# EAGLE board Bienenlöter (EAGLE 4.09)
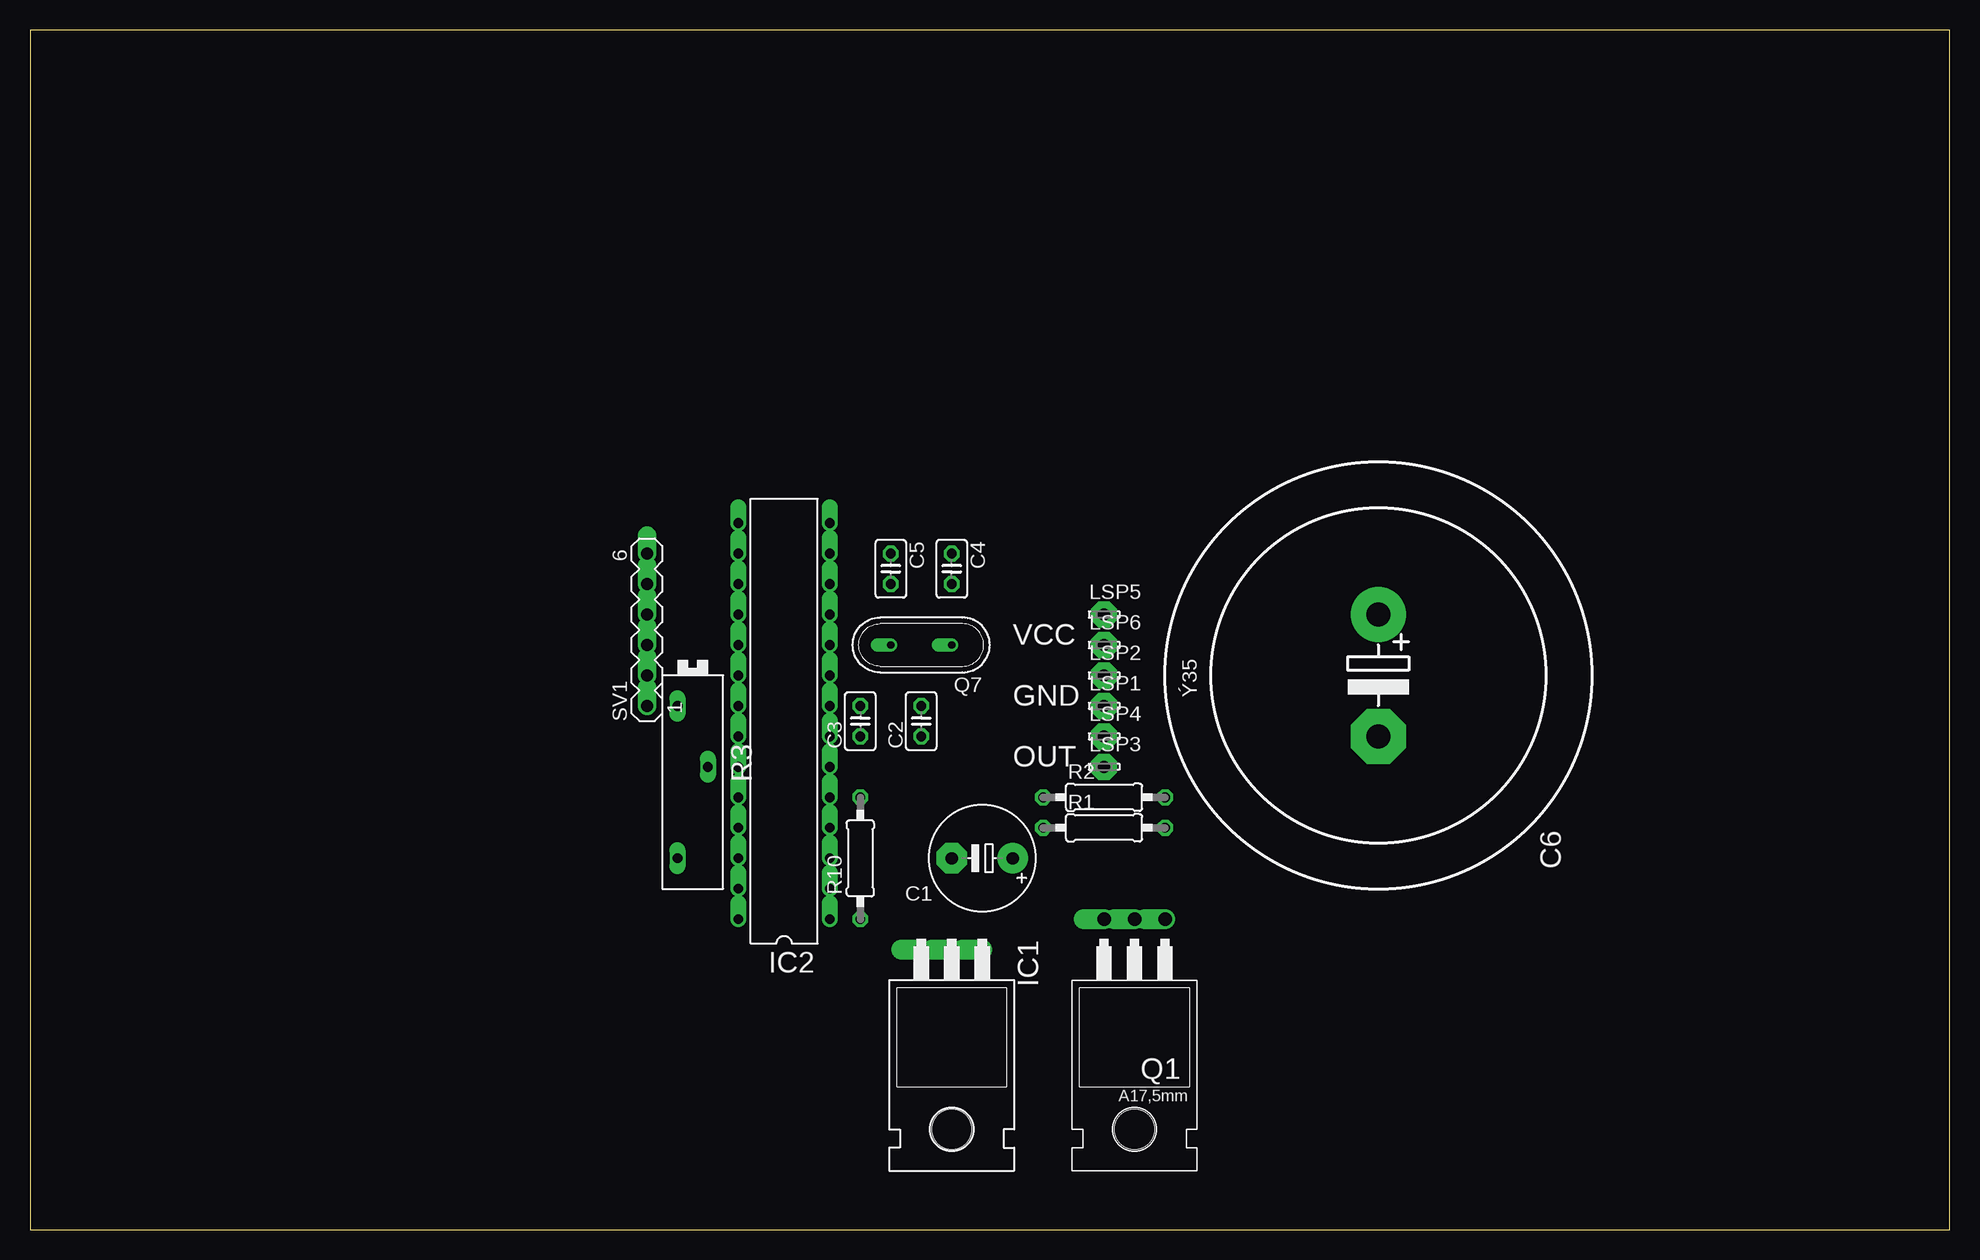
[diagram p0: board, top side]
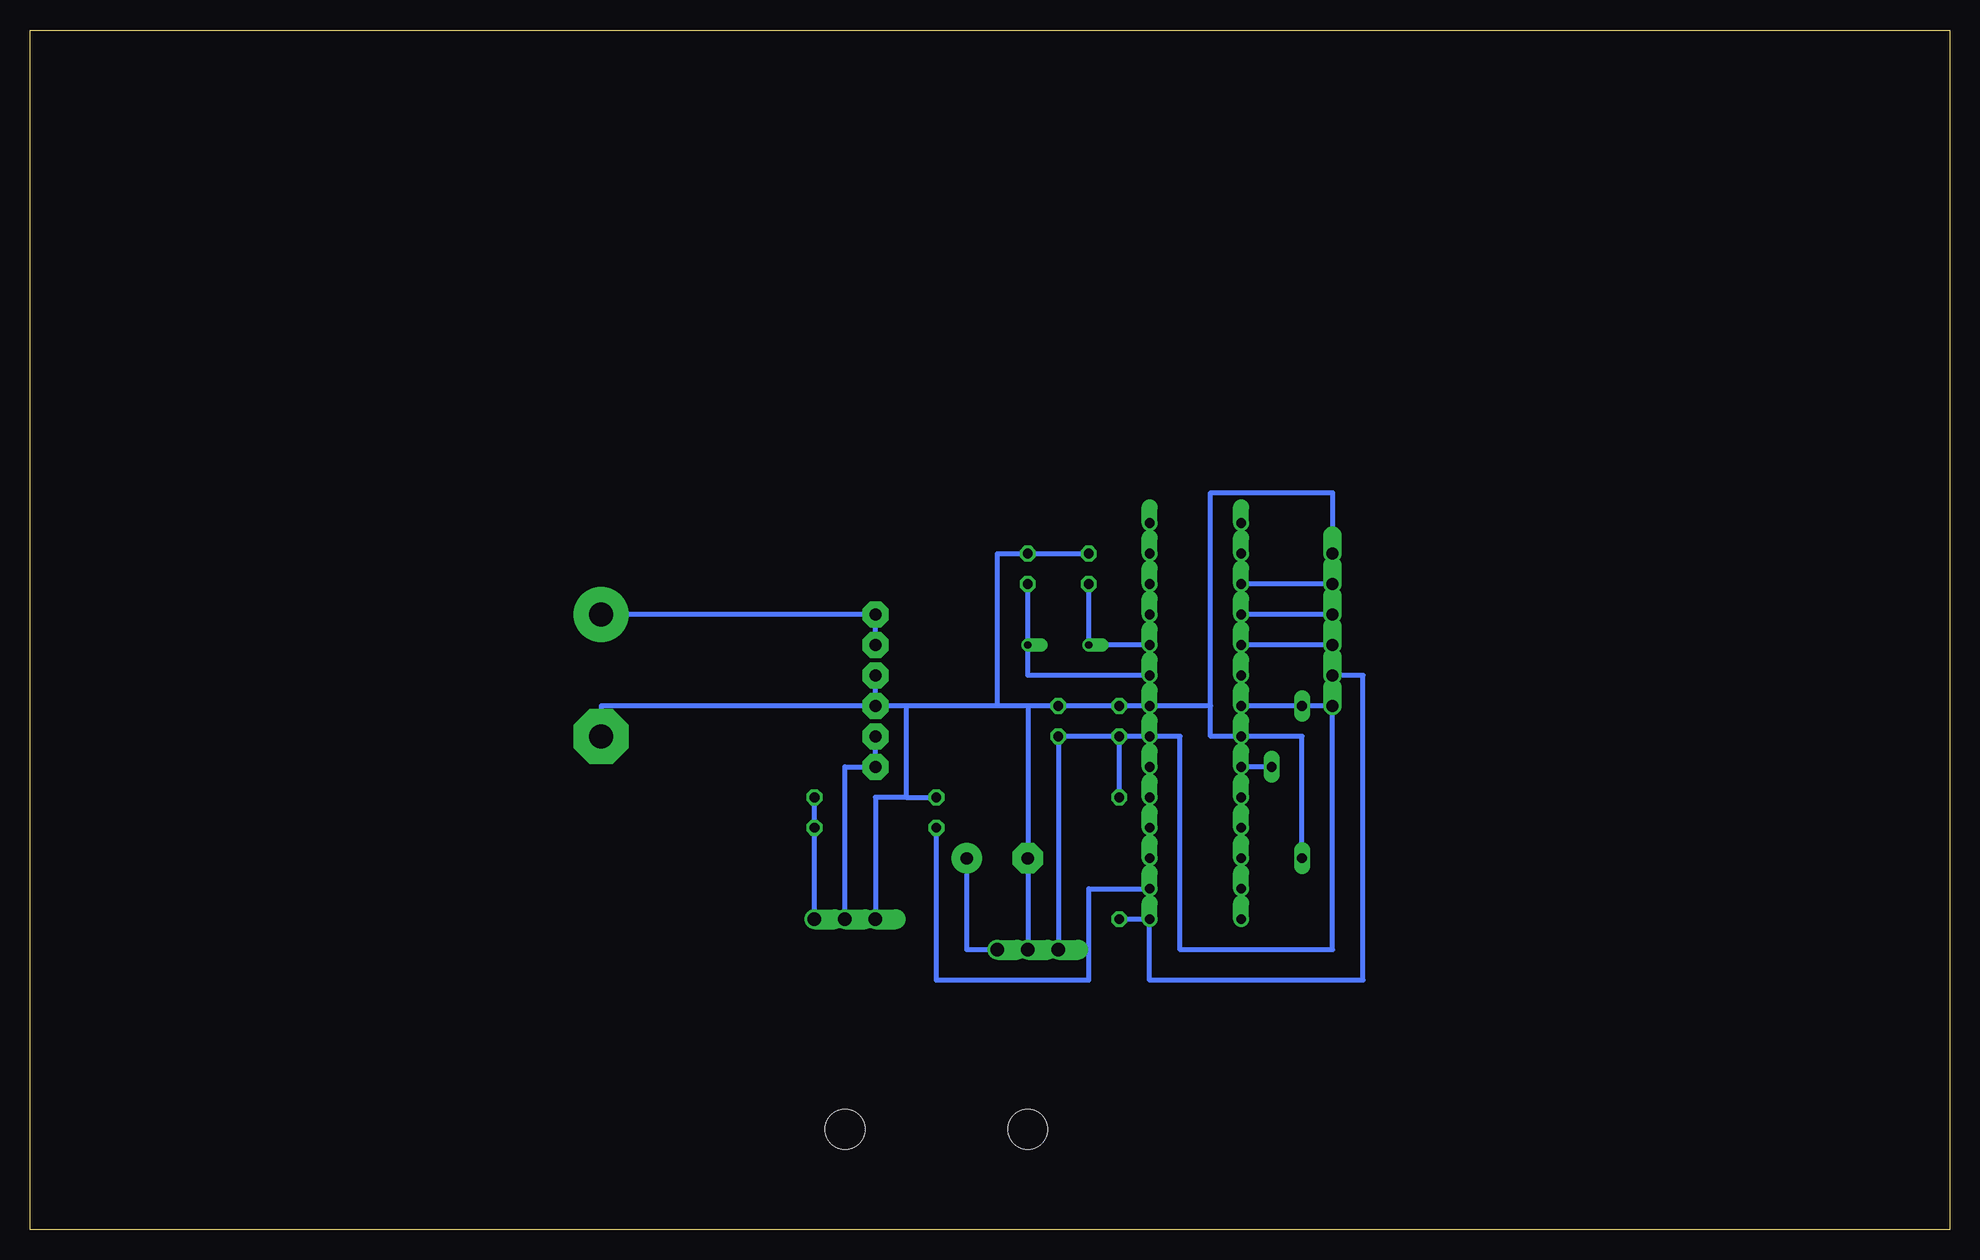
[diagram p1: board, bottom side, seen from below]

Size 160 x 100 mm. Coordinates in mm from the lower left corner, seen from the top.
Outline: 0,0 160,0 160,100 0,100 0,0
Copper layers used: Bottom

## Footprints (pad centres in the part's own frame; a part is rotated, then mirrored left to right if it is on the bottom)
E5-8,5 = drill 1.016 pad 2.54 round: + -2.54,0 | drill 1.016 pad 2.54 octagon: - 2.54,0
C025-025X050 = drill 0.813 octagon: 1 -1.27,0; 2 1.27,0
EB35D = drill 2.007 pad 4.597 round: + -5.08,0 | drill 2.007 pad 4.597 octagon: - 5.08,0
TO220H = drill 1.118 offset: 1 -2.54,-10.16; 2 0,-10.16; 3 2.54,-10.16 | hole 3.302: 0,4.826
DIL28-3 = drill 0.813 offset: 1 -16.51,-3.81; 2 -13.97,-3.81; 3 -11.43,-3.81; 4 -8.89,-3.81; 5 -6.35,-3.81; 6 -3.81,-3.81; 7 -1.27,-3.81; 8 1.27,-3.81; 9 3.81,-3.81; 10 6.35,-3.81; 11 8.89,-3.81; 12 11.43,-3.81; 13 13.97,-3.81; 14 16.51,-3.81; 15 16.51,3.81; 16 13.97,3.81; 17 11.43,3.81; 18 8.89,3.81; 19 6.35,3.81; 20 3.81,3.81; 21 1.27,3.81; 22 -1.27,3.81; 23 -3.81,3.81; 24 -6.35,3.81; 25 -8.89,3.81; 26 -11.43,3.81; 27 -13.97,3.81; 28 -16.51,3.81
LSP10 = drill 1.016 pad 2.159 octagon: MP 0,0
TO220 = drill 1.118 offset: 1 -2.54,-6.35; 2 0,-6.35; 3 2.54,-6.35 | hole 3.302: 0,11.176
QS = drill 0.61 offset: 1 -2.54,0; 2 2.54,0
0207/10 = drill 0.813 octagon: 1 -5.08,0; 2 5.08,0
PT-SPIN = drill 0.813 long: A -6.35,-1.27; E 6.35,-1.27; S -1.27,1.27
MA06-1 = drill 1.016 offset: 1 -6.35,0; 2 -3.81,0; 3 -1.27,0; 4 1.27,0; 5 3.81,0; 6 6.35,0

## Placement (x,y rotation side)
C1  220µF  [E5-8,5]  79.37,30.95 180 top
C2  100nF  [C025-025X050]  74.29,42.38 90 top
C3  100nF  [C025-025X050]  69.21,42.38 90 top
C4  1pF  [C025-025X050]  76.83,55.08 270 top
C5  1pF  [C025-025X050]  71.75,55.08 270 top
C6  [EB35D]  112.39,46.19 270 top
IC1  7805T  [TO220H]  76.83,13.17 180 top
IC2  AT90S4433P  [DIL28-3]  62.86,42.38 90 top
LSP1  LSP10  [LSP10]  89.53,43.65 0 top
LSP2  LSP10  [LSP10]  89.53,46.19 0 top
LSP3  LSP10  [LSP10]  89.53,38.57 0 top
LSP4  LSP10  [LSP10]  89.53,41.11 0 top
LSP5  LSP10  [LSP10]  89.53,51.27 0 top
LSP6  LSP10  [LSP10]  89.53,48.73 0 top
Q1  IRF540  [TO220]  92.07,19.52 180 top
Q7  [QS]  74.29,48.73 180 top
R1  1k  [0207/10]  89.53,33.49 0 top
R2  100k  [0207/10]  89.53,36.03 0 top
R3  5k  [PT-SPIN]  55.24,37.3 270 top
R10  10k  [0207/10]  69.21,30.95 90 top
SV1  [MA06-1]  51.43,50 90 top

## Library data of the parts
C1-C6 R1 R2 R10 = rcl
IC1 = linear
IC2 = atmel
LSP1-LSP6 = solpad
Q1 = transistor-fet
Q7 = special
R3 = pot
SV1 = con-lstb

## Nets
+5V: C2.1 C3.1 IC1.3 IC2.7 IC2.20 IC2.21 R3.A R10.2 SV1.1
+12V: C1.+ IC1.1
GND: C1.- C2.2 C3.2 C4.1 C5.1 C6.- IC1.2 IC2.8 IC2.22 LSP1.MP LSP2.MP Q1.3 R2.1 R3.E SV1.6
N$3: IC2.1 R10.1 SV1.2
N$4: IC2.2 R1.1
N$5: Q1.1 R1.2 R2.2
N$7: IC2.23 R3.S
N$9: IC2.19 SV1.3
N$10: IC2.18 SV1.4
N$11: IC2.17 SV1.5
N$13: LSP3.MP LSP4.MP Q1.2
N$14: C6.+ LSP5.MP LSP6.MP
N$20: C4.2 IC2.9 Q7.1
N$21: C5.2 IC2.10 Q7.2

## Tracks (layer width: path | path; a pad name or v marks a point on that pad's centre or on a via)
+5V
  Bottom 0.406: SV1.1 IC2.21 IC2.20 | C3.1 IC2.7 64.13,41.11 64.13,23.33 51.43,23.33 SV1.1 | SV1.1 R3.A | C3.1 R10.2 | C3.1 C2.1 IC1.3
+12V
  Bottom 0.406: IC1.1 81.91,23.33 C1.+
GND
  Bottom 0.406: 61.59,43.65 61.59,61.43 51.43,61.43 SV1.6 | 61.59,43.65 IC2.8 | 61.59,43.65 61.59,41.11 IC2.22 53.97,41.11 R3.E | C5.1 C4.1 79.37,56.35 79.37,43.65 | IC2.8 C3.2 | IC2.8 C3.2 | C3.2 C2.2 76.83,43.65 | 86.99,36.03 R2.1 | IC1.2 C1.- 76.83,43.65 | 76.83,43.65 79.37,43.65 | 86.99,43.65 LSP1.MP | 86.99,43.65 86.99,36.03 | 86.99,36.03 89.53,36.03 Q1.3 | LSP1.MP LSP2.MP | C6.- 112.39,43.65 LSP1.MP | 79.37,43.65 86.99,43.65
N$3
  Bottom 0.406: R10.1 IC2.1 66.67,20.79 48.89,20.79 48.89,46.19 SV1.2
N$4
  Bottom 0.406: IC2.2 71.75,28.41 71.75,20.79 84.45,20.79 R1.1
N$5
  Bottom 0.406: Q1.1 R1.2 R2.2
N$7
  Bottom 0.406: R3.S IC2.23
N$9
  Bottom 0.406: SV1.3 IC2.19
N$10
  Bottom 0.406: SV1.4 IC2.18
N$11
  Bottom 0.406: SV1.5 IC2.17
N$13
  Bottom 0.406: Q1.2 92.07,38.57 LSP3.MP LSP4.MP
N$14
  Bottom 0.406: C6.+ LSP5.MP LSP6.MP
N$20
  Bottom 0.406: IC2.9 76.83,46.19 Q7.1 C4.2
N$21
  Bottom 0.406: IC2.10 Q7.2 C5.2

## Text on the board
tPlace: VCC | GND | OUT